# Altium PCB PCB1.PcbDoc (part 4 of 7)
Units mil, origin at the board's own origin, x right, y up, seen from the top; angles counter-clockwise.
Board outline 2100 x 2700 mil, 6 copper layers (Top Layer, Layer 2, Layer 3, Layer 4, Layer 5, Bottom Layer), stack 32.112 mil thick; 200 components, 319 nets, 1280 pads, 807 vias.
Unrouted connection lines stored in the file: 4.
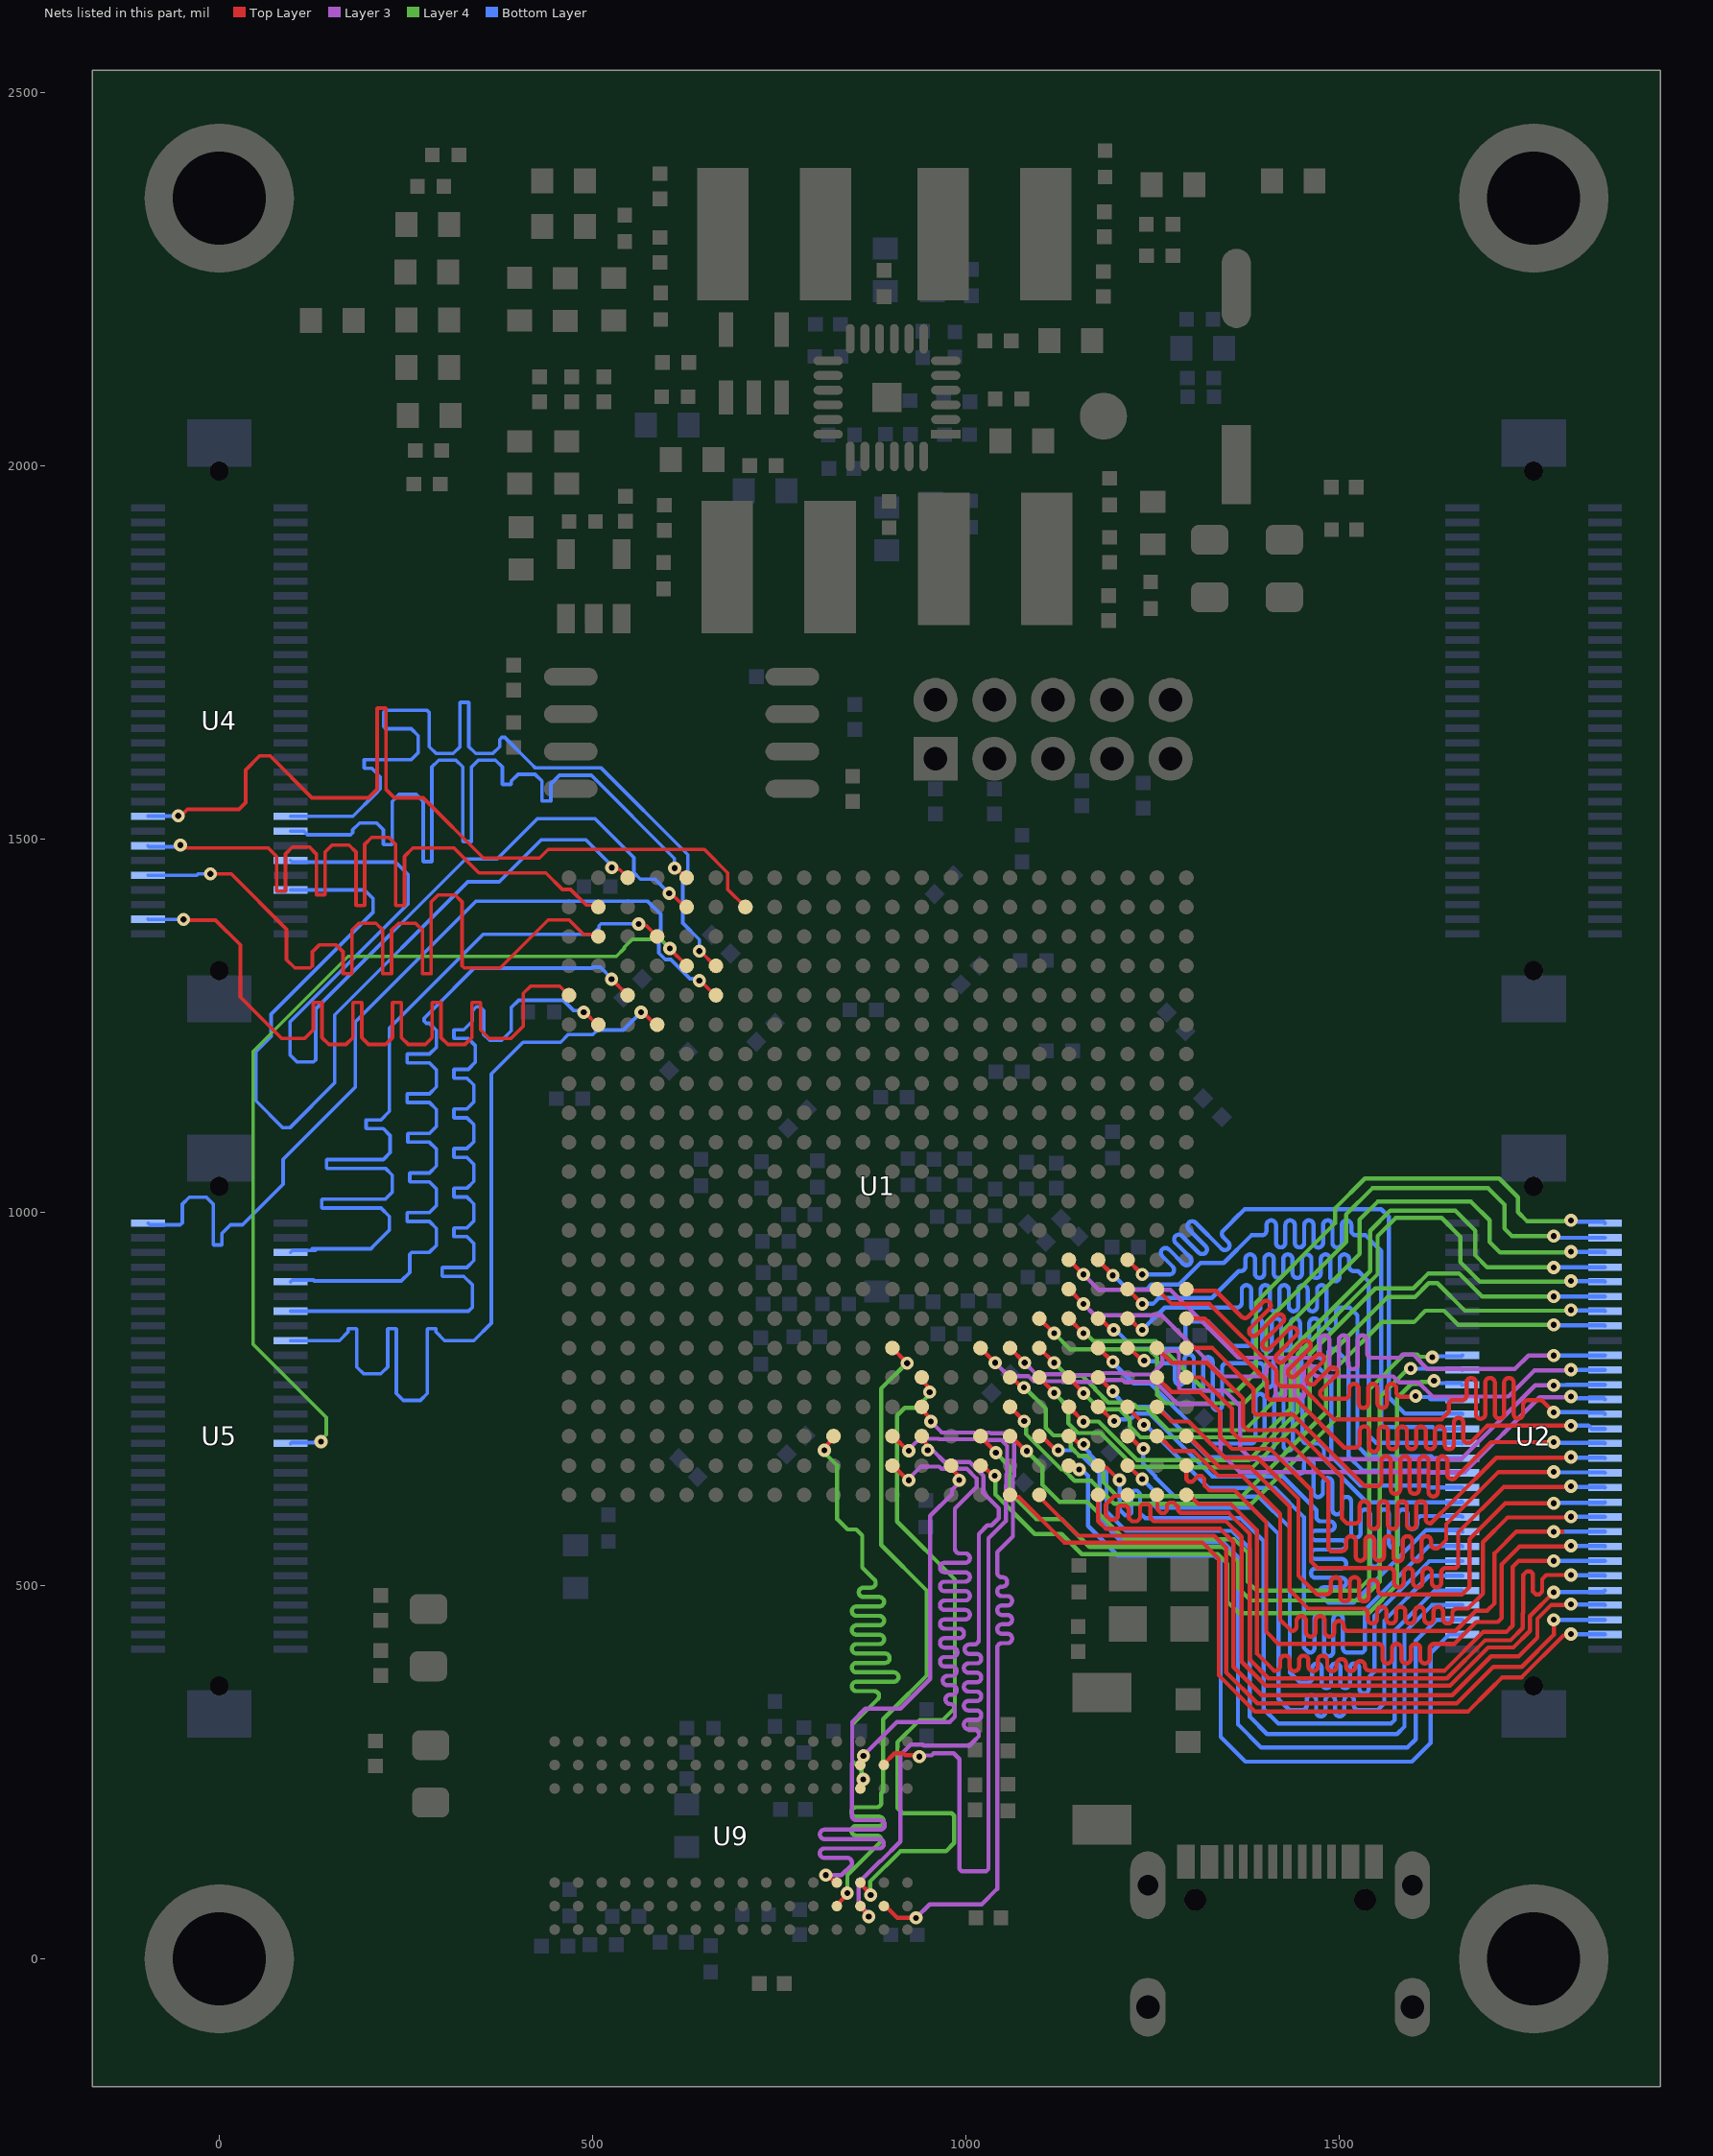
[diagram p8: the nets of this part, all layers, seen from the top]

## Via types
v1: diameter 17.7, hole 7.9, Top Layer to Bottom Layer, tented both sides, 807 vias

## Nets (pads, with @x,y where several pads share a name; then routed paths per layer and width w, separated by ;. In a path a pad name is that pad's centre, name@x,y a point inside that pad or via, vN(x,y) a via of type N, cw(c..) or ccw(c..) an arc to the next point about the centre after c; other vN are vias at no path point) (continued)
B16_P_L11: U1.B17 U5.48 | length 1225.4
  Top Layer w4.77: v1(487.87,1267.74) 489.4,1267.74 506.03,1251.11 U1.B17@507.56,1251.11
  Bottom Layer w4.77: U5.48@95.47,867.31 333.44,867.31 338.77,872.64 338.77,889.79 338.77,902.62 327.32,914.07 298.93,914.07 298.34,914.66 298.34,925.25 298.93,925.84 331.53,925.84 340.77,935.08 340.77,957.91 331.53,967.15 314.76,967.15 314.17,967.74 314.17,978.33 314.76,978.92 331.53,978.92 340.77,988.16 340.77,1010.99 331.53,1020.23 314.76,1020.23 314.17,1020.82 314.17,1031.41 314.76,1032 331.53,1032 340.77,1041.24 340.77,1064.07 331.53,1073.31 314.76,1073.31 314.17,1073.9 314.17,1084.49 314.76,1085.08 331.53,1085.08 340.77,1094.32 340.77,1117.15 331.53,1126.39 314.76,1126.39 314.17,1126.98 314.17,1137.57 314.76,1138.16 331.53,1138.16 340.77,1147.4 340.77,1170.23 331.53,1179.47 314.76,1179.47 314.17,1180.06 314.17,1190.65 314.76,1191.24 333.32,1191.24 342.56,1200.48 342.56,1223.31 333.32,1232.55 314.76,1232.55 314.17,1233.14 314.17,1243.73 314.76,1244.32 327.32,1244.32 338.77,1255.76 338.77,1268.64 338.77,1269.77 344,1275 349,1275 354,1270 354,1238 362,1230 378,1230 391,1243 391,1274 400.72,1283.73 417.89,1283.73 430.1,1283.74 460.71,1283.73 474.7,1269.74 485.87,1269.74 v1(487.87,1267.74)
B16_P_L12: U1.D17 U5.44 | length 1182.5
  Top Layer w4.77: v1(564.67,1267.82) 567.13,1267.82 583.84,1251.11 U1.D17@586.3,1251.11
  Bottom Layer w4.77: U5.44@95.47,827.94 148,827.94 160.83,827.94 172.28,839.39 172.28,843.18 172.86,843.77 183.46,843.77 184.05,843.18 184.05,792.61 193.29,783.37 216.12,783.37 225.36,792.61 225.36,843.18 225.94,843.77 236.54,843.77 237.13,843.18 237.13,757.18 246.37,747.94 269.2,747.94 278.44,757.18 278.44,843.18 279.02,843.77 289.62,843.77 290.21,843.18 290.21,839.39 301.65,827.94 324.18,827.94 340.94,827.94 364.31,851.31 364.31,1185.12 405,1225.81 406.84,1227.65 456.97,1227.65 467.09,1237.76 500.09,1237.76 506.33,1244 540.85,1244 v1(564.67,1267.82)
B16_P_L13: U1.C18 U5.52 | length 1188.8
  Top Layer w4.77: v1(525.27,1311.95) 525.36,1311.95 543.89,1293.43 544.09,1293.43 544.09,1290.48 U1.C18@546.93,1290.48
  Bottom Layer w4.77: U5.52@95.47,906.68 97.93,909.14 125.85,909.14 127.25,907.74 243.55,907.74 255,919.19 255,921.56 255,943.44 257.79,946.24 281.39,946.24 290.63,955.48 290.63,978.31 281.39,987.55 251.99,987.55 251.4,988.14 251.4,998.73 251.99,999.32 281.39,999.32 290.63,1008.56 290.63,1031.39 281.39,1040.63 255.6,1040.63 255.01,1041.22 255.01,1051.81 255.6,1052.4 281.39,1052.4 290.63,1061.64 290.63,1084.47 281.39,1093.71 252.92,1093.71 252.33,1094.3 252.33,1104.89 252.92,1105.48 281.39,1105.48 290.63,1114.72 290.63,1137.55 281.39,1146.79 251.99,1146.79 251.4,1147.38 251.4,1157.97 251.99,1158.56 281.39,1158.56 290.63,1167.8 290.63,1190.63 281.39,1199.87 251.99,1199.87 251.4,1200.46 251.4,1211.05 251.99,1211.64 281.39,1211.64 290.63,1220.88 290.63,1243.71 281.39,1252.95 277.07,1252.95 274.27,1255.74 274.27,1259.69 287.1,1272.52 341.29,1326.71 405,1326.71 498.93,1326.71 500.19,1327.97 510.39,1327.97 525.27,1313.1 v1(525.27,1311.95)
B16_P_L14: U1.E19 U5.30 | length 1266.6
  Top Layer w4.77: v1(603.34,1353.1) 603.34,1352.64 625.67,1330.31 U1.E19@625.67,1329.85
  Layer 4 w4.77: v1(136,692.7) 136,694.72 143.24,701.96 143.24,724.99 45.23,823 45.23,1215.23 172.52,1342.52 405,1342.52 531.74,1342.52 542.36,1353.14 542.36,1354.81 552.98,1365.43 591.01,1365.43 v1(603.34,1353.1)
  Bottom Layer w4.77: U5.30@95.47,690.15 96.75,691.42 134.72,691.42 v1(136,692.7)
B16_P_L15: U1.F18 U5.59 | length 1206.1
  Top Layer w4.77: v1(642.76,1310.17) 644.06,1310.17 663.74,1290.48 U1.F18@665.04,1290.48
  Bottom Layer w4.77: U5.59@-95.46,985.42 -93.01,982.97 -59,982.97 -52.29,982.97 -49.49,985.76 -49.49,1010.78 -40.25,1020.02 -17.42,1020.02 -8.18,1010.78 -8.18,956.59 -7.6,956.01 3,956.01 3.59,956.59 3.59,971.52 15.03,982.97 31.08,982.97 61,1012.89 85.45,1037.33 85.45,1070.87 182,1167.42 182,1254.89 343.37,1416.26 573.87,1416.26 591,1399.13 591,1366.88 588.6,1364.48 588.6,1347 597.24,1338.37 604.6,1338.37 630.33,1312.64 640.28,1312.64 v1(642.76,1310.17)
B16_P_L16: U1.B20 U4.9 | length 1210.4
  Top Layer w4.77: v1(-12,1452.97) 16,1452.97 90,1378.97 90,1338 101,1327 115,1327 121.71,1327 124.51,1329.79 124.51,1348.52 133.75,1357.76 156.58,1357.76 165.82,1348.52 165.82,1319.83 166.4,1319.25 177,1319.25 177.59,1319.83 177.59,1377.76 186.83,1387 209.66,1387 218.9,1377.76 218.9,1319.83 219.48,1319.25 230.08,1319.25 230.67,1319.83 230.67,1377.76 239.91,1387 262.74,1387 271.98,1377.76 271.98,1319.83 272.56,1319.25 283.16,1319.25 283.75,1319.83 283.75,1415.41 292.99,1424.65 315.82,1424.65 325.06,1415.41 325.06,1329.79 327.85,1327 376,1327 396.65,1347.65 440.27,1391.27 468.38,1391.27 487.66,1371.99 504.79,1371.99 U1.B20@507.56,1369.22
  Bottom Layer w4.77: U4.9@-95.47,1451.3 -30.31,1451.3 -28.64,1452.97 v1(-12,1452.97)
B16_P_L17: U1.A18 U4.3 | length 1212.8
  Top Layer w4.77: v1@-43.07,1391.14 -5.14,1391.14 28.16,1357.84 28.16,1287.95 83.44,1232.67 101.52,1232.67 114.35,1232.67 125.8,1244.12 125.8,1280.35 126.39,1280.94 136.98,1280.94 137.57,1280.35 137.57,1233.78 146.81,1224.54 169.64,1224.54 178.88,1233.78 178.88,1280.35 179.47,1280.94 190.06,1280.94 190.65,1280.35 190.65,1233.78 199.89,1224.54 222.72,1224.54 231.96,1233.78 231.96,1280.35 232.55,1280.94 243.14,1280.94 243.73,1280.35 243.73,1233.78 252.97,1224.54 275.8,1224.54 285.04,1233.78 285.04,1280.35 285.63,1280.94 296.22,1280.94 296.81,1280.35 296.81,1233.78 306.05,1224.54 328.88,1224.54 338.12,1233.78 338.12,1280.35 338.71,1280.94 349.3,1280.94 349.89,1280.35 349.89,1244.12 361.33,1232.67 379.7,1232.67 390.67,1232.67 407,1249 407,1293 416.78,1302.78 455.89,1302.78 U1.A18@468.19,1290.48
  Bottom Layer w4.77: U4.3@-95.47,1392.24 -95.35,1392.12 -48.12,1392.12 v1(-48,1392)
B16_P_L18: U1.F19 U4.18 | length 1194.6
  Top Layer w4.77: v1(642.76,1349.54) 644.06,1349.54 663.74,1329.85 U1.F19@665.04,1329.85
  Bottom Layer w4.77: U4.18@95.47,1530.04 178.93,1530.04 208.89,1560 215.6,1566.71 215.6,1582.9 204.15,1594.35 194.46,1594.35 193.87,1594.93 193.87,1605.53 194.46,1606.12 257.04,1606.12 266.28,1615.36 266.28,1638.18 257.04,1647.43 222.84,1647.43 220.04,1650.22 220.04,1666 220.04,1669.21 222.84,1672 245,1672 278.25,1672 281.05,1669.21 281.05,1623.45 290.29,1614.21 313.12,1614.21 322.36,1623.45 322.36,1682.28 322.94,1682.86 333.54,1682.86 334.13,1682.28 334.13,1623.45 343.37,1614.21 366.2,1614.21 375.44,1623.45 375.44,1633.02 378.23,1635.82 382.18,1635.82 418.44,1599.56 422.77,1595.23 474.5,1595.23 510.88,1595.23 627.44,1478.67 627.44,1457.71 620.72,1450.99 620.72,1387.21 642.88,1365.05 642.88,1349.66 v1(642.76,1349.54)
B16_P_L19: U1.D20 U5.56 | length 1228.2
  Top Layer w4.77: v1(561.49,1385.96) 563.97,1383.49 572.03,1383.49 U1.D20@586.3,1369.22
  Bottom Layer w4.77: U5.56@95.47,946.05 97.97,948.56 128.44,948.56 ; 124.36,950.97 202.86,950.97 207.18,955.29 227.86,975.97 227.86,981.35 227.86,994.18 216.41,1005.63 137.66,1005.63 137.07,1006.22 137.07,1016.81 137.66,1017.4 222.23,1017.4 231.47,1026.64 231.47,1049.47 222.23,1058.71 144.15,1058.71 143.56,1059.3 143.56,1069.89 144.15,1070.48 219.55,1070.48 228.79,1079.72 228.79,1102.55 219.55,1111.79 197.23,1111.79 196.64,1112.38 196.64,1122.97 197.23,1123.56 216.41,1123.56 227.86,1135 227.86,1150 227.86,1246.57 353.28,1371.99 405,1371.99 499.85,1371.99 508.5,1380.64 508.5,1383.57 511.3,1386.36 561.1,1386.36 v1(561.49,1385.96)
B16_P_L20: U1.C22 U4.8 | length 1201.5
  Top Layer w4.77: v1(525.63,1461.31) 528.08,1458.85 536.04,1458.85 543.65,1451.24 543.65,1447.96 U1.C22@546.93,1447.96
  Bottom Layer w4.77: U4.8@95.47,1431.61 194.24,1431.61 205.69,1420.17 205.69,1401.26 69.46,1265.03 69.46,1235.46 49,1215 49,1149 85.02,1112.98 94.27,1112.98 154.54,1173.25 154.54,1264.25 332.82,1442.53 374.82,1442.53 431.06,1498.77 490.88,1498.77 525.63,1464.03 v1(525.63,1461.31)
B16_P_L21: U1.B21 U4.13 | length 1182
  Top Layer w4.77: v1(-52.2,1491.67) -52.2,1488.2 -51.77,1487.77 26,1487.77 65.37,1487.77 76.82,1476.32 76.82,1430.36 77.4,1429.77 88,1429.77 88.59,1430.36 88.59,1479.83 97.83,1489.07 120.66,1489.07 129.9,1479.83 129.9,1425.59 130.48,1425.01 141.08,1425.01 141.67,1425.59 141.67,1482.44 150.91,1491.68 173.74,1491.68 182.98,1482.44 182.98,1411.13 183.56,1410.54 194.16,1410.54 194.75,1411.13 194.75,1492.57 203.99,1501.81 226.82,1501.81 236.06,1492.57 236.06,1411.13 236.64,1410.54 247.24,1410.54 247.83,1411.13 247.83,1476.32 259.27,1487.77 280.14,1487.77 314.23,1487.77 347.69,1454.31 437.16,1454.31 459.24,1432.23 470.34,1432.23 491.13,1411.44 504.71,1411.44 U1.B21@507.56,1408.59
  Bottom Layer w4.77: U4.13@-95.47,1490.67 -94.13,1489.33 -53.33,1489.33 -53.33,1490.54 v1(-52.2,1491.67)
B16_P_L22: U1.E22 U4.16 | length 1202.6
  Top Layer w4.77: v1(609.74,1460.84) 611.26,1460.84 624.15,1447.96 U1.E22@625.67,1447.96
  Bottom Layer w4.77: U4.16@95.47,1510.35 113.19,1510.35 118.1,1505.44 169,1505.44 175.71,1505.44 178.51,1508.23 178.51,1512.03 187.75,1521.27 210.58,1521.27 219.82,1512.03 219.82,1492.9 220.4,1492.31 231,1492.31 231.59,1492.9 231.59,1550.06 240.83,1559.3 263.66,1559.3 272.9,1550.06 272.9,1470.02 273.48,1469.43 284.08,1469.43 284.67,1470.02 284.67,1596.2 293.91,1605.44 316.74,1605.44 325.98,1596.2 325.98,1497.13 326.56,1496.54 337.16,1496.54 337.75,1497.13 337.75,1596.2 346.99,1605.44 369.82,1605.44 379.06,1596.2 379.06,1573.37 379.64,1572.78 390.24,1572.78 390.83,1573.37 390.83,1577.22 400.07,1586.46 422.9,1586.46 432.14,1577.22 432.14,1551.12 432.72,1550.53 443.32,1550.53 443.91,1551.12 443.91,1573.55 455.35,1585 482.11,1585 498.15,1585 609.47,1473.67 609.47,1461.11 v1(609.74,1460.84)
B16_P_L23: U1.E21 U4.12 | length 1242.8
  Top Layer w4.77: v1(602.41,1426.95) 604.86,1426.95 623.22,1408.59 U1.E21@625.67,1408.59
  Bottom Layer w4.77: U4.12@95.47,1470.98 97.68,1468.77 236.12,1468.77 252.77,1452.12 252.77,1412.77 94.77,1254.77 94.77,1210.33 104,1201.1 126.21,1201.1 129,1203.89 129,1272 330,1473 372,1473 425.99,1526.99 503.08,1526.99 555.13,1474.93 555.13,1454.74 563.77,1446.11 583.25,1446.11 v1(602.41,1426.95)
B16_P_L24: U1.G21 U4.17 | length 1191.4
  Top Layer w4.77: v1(-54.94,1530.76) -51.45,1530.76 -42.87,1539.34 26.22,1539.34 35.33,1548.44 35.33,1592.33 54,1611 68,1611 124,1555 187,1555 199.83,1555 211.28,1566.45 211.28,1674.41 211.86,1675 222.46,1675 223.05,1674.41 223.05,1566.45 234.49,1555 258,1555 273,1555 353.66,1474.33 428.91,1474.33 440.43,1485.85 649.39,1485.85 680.77,1454.48 680.77,1432.23 U1.G21@704.41,1408.59
  Bottom Layer w4.77: U4.17@-95.47,1530.04 -95.1,1530.4 -55.31,1530.4 v1(-54.94,1530.76)
B34_IO0: U1.T3 U2.41 | length 1010.6
  Top Layer w5.61: U1.T3@1058.74,699.93 1059.98,699.93 1079.91,680 v1(1081.15,680)
  Layer 4 w5.61: v1(1081.15,680) 1102.15,659 1102.15,634.84 1125.11,611.89 1162.23,611.89 1212.12,562 1359,562 1377,544 1377,505 1389,493 1524,493 1540,509 1540,762.59 1586.54,809.13 1604.25,809.13 1607.05,806.32 1623.51,806.32 v1(1624.32,805.52)
  Bottom Layer w5.61: v1(1624.32,805.52) 1625.69,806.89 1663.17,806.89 U2.41@1664.54,808.26
B34_IO25: U1.U7 U2.58 | length 1067.1
  Top Layer w5.61: U1.U7@1098.11,857.41 v1(1117.8,837.72)
  Layer 4 w5.61: v1(1117.8,837.72) 1139.2,816.32 1244.69,816.32 1256,805 1256,755 1267,744 1372,744 1402,774 1402,853 1509,960 1509,997 1544,1032 1699,1032 1721,1010 1721,978 1731,968 v1(1787,968)
  Bottom Layer w5.61: v1(1787,968) 1789.26,965.74 U2.58@1855.47,965.74
B34_N_L1: U1.U1 U2.6 | length 1021.4
  Top Layer w5.61: U1.U1@1098.11,621.19 1098.11,618.74 1150.2,566.65 1332.35,566.65 1341,558 1348.39,550.61 1348.39,383.61 1390,342 1657,342 1706,391 1744,391 1787,434 v1(1787,454)
  Bottom Layer w5.61: 1796,454 1796.04,453.96 U2.6@1855.43,453.96 ; U2.6@1855.43,453.96 U2.6@1855.47,453.93
B34_N_L2: U1.V2 U2.3 | length 994.3
  Bottom Layer w5.61: v1(1151.49,655.45) 1154.71,655.45 1163.23,646.93 1163.23,579.77 1203,540 1333,540 1341,532 1341,297 1374,264 1597,264 1622,289 1622,409.43 1646.82,434.24 U2.3@1664.53,434.24 U2.3@1663.77,435
B34_N_L3: U1.R2 U2.37 | length 1048.8
  Top Layer w5.61: U1.R2@1019.37,660.56 1022.53,660.56 1022.53,660.12 1035.74,646.92 v1(1038.47,646.92)
  Layer 4 w5.61: v1(1038.47,646.92) 1039.19,646.2 1039.19,621.81 1092,569 1128,569 1155,542 1337,542 1350,529 1350,478 1365,463 1539,463 1577,501 1577,750.79 1596.21,770 1606.5,770 1609.31,772.81 1625.17,772.81 v1(1626.57,774.21)
  Bottom Layer w5.61: v1(1626.57,774.21) 1629.84,774.21 1633.12,770.93 1662.49,770.93 U2.37@1664.54,768.89
B34_N_L4: U1.Y2 U2.11 | length 985.4
  Top Layer w5.61: U1.Y2@1216.22,660.56 1217,660.56 1235.13,642.43 v1(1235.91,642.43)
  Bottom Layer w5.61: v1(1235.91,642.43) 1251,627.34 1251,608 1255,604 1383,604 1418.5,568.5 1418.5,347.5 1433,333 1447,333 1449.81,333 ccw(c1449.81,339.3) 1456.11,339.3 1456.11,346.7 cw(c1462.42,346.7) 1468.72,346.7 1468.72,330.91 ccw(c1475.03,330.91) 1481.33,330.91 1481.33,346.7 cw(c1487.64,346.7) 1493.94,346.7 1493.94,330.91 ccw(c1500.25,330.91) 1506.55,330.91 1506.55,346.7 cw(c1512.86,346.7) 1519.16,346.7 1519.16,339.3 ccw(c1525.47,339.3) 1525.47,333 1548.38,333 1551,333 1560,342 1560,453 1619.98,512.98 U2.11@1664.53,512.98
B34_N_L5: U1.Y1 U2.10 | length 1042
  Top Layer w5.61: U1.Y1@1216.22,621.19 1215.03,620 1198.5,620 1187,608.5 1187,594 1193,588 1199.71,588 1203,591.29 1203,603.71 1206.29,607 1214,607 1218,603 1218,590 1222,586 1229,586 1233,590 1233,605.71 1236.29,609 1243.71,609 1247,605.71 1247,590.29 1251.29,586 1347.91,586 1368.91,565 1368.91,398.09 1401,366 1648,366 1699,417 1732.91,417 1755,439.09 1755,459 v1(1787,491)
  Bottom Layer w5.61: v1(1787,491) 1832.35,491 1832.53,491.18 1853.35,491.18 U2.10@1855.47,493.3
B34_N_L6: U1.V3 U2.7 | length 1004.3
  Top Layer w5.61: U1.V3@1137.48,699.93 1141.29,699.93 1149.9,691.32 1155.22,691.32 v1(1157.53,689.01)
  Bottom Layer w5.61: v1(1157.53,689.01) 1157.53,685.73 1165.03,678.24 1165.03,676.22 1188,653.25 1188,599 1214,573 1356,573 1380,549 1380,324 1403,301 1577,301 1587,311 1587,437 1623.61,473.61 U2.7@1664.53,473.61
B34_N_L7: U1.AB1 U2.14 | length 982.2
  Top Layer w5.61: U1.AB1@1294.96,621.19 1298.77,621.19 1310.96,609 1354.48,609 1389.61,573.87 1389.61,408.61 1411.48,386.74 1412.22,386 1414.28,386 ccw(c1414.28,392.3) 1420.59,392.3 1420.59,399.7 cw(c1426.89,399.7) 1433.2,399.7 1433.2,391.53 ccw(c1439.5,391.53) 1445.81,391.53 1445.81,399.7 cw(c1452.11,399.7) 1458.42,399.7 1458.42,391.53 ccw(c1464.72,391.53) 1471.03,391.53 1471.03,399.7 cw(c1477.33,399.7) 1483.64,399.7 1483.64,391.53 ccw(c1489.94,391.53) 1496.25,391.53 1496.25,395.15 cw(c1502.55,395.15) 1508.86,395.15 1508.86,391.53 ccw(c1515.16,391.53) 1521.47,391.53 1521.47,392.31 cw(c1527.77,392.31) 1534.08,392.31 ccw(c1540.38,392.3) 1540.38,386 1611.48,386 1640.82,386 1692.82,438 1723.78,438 1731.89,446.11 1731.89,524.89 1740,533 v1(1787,533)
  Bottom Layer w5.61: v1@1795,533 1795.17,532.83 1855.3,532.83 U2.14@1855.47,532.67
B34_N_L8: U1.AB2 U2.16 | length 993.5
  Top Layer w5.61: U1.AB2@1294.96,660.56 1294.96,642.18 1298.25,638.89 1302.89,638.89 1310.68,646.68 1315.32,646.68 1319,643 1319,634 1326,627 1360,627 1402,585 1402,438 1418.12,421.88 1536,421.88 1551.42,421.88 cw(c1551.42,415.58) 1557.72,415.58 1557.72,401.91 ccw(c1564.03,401.91) 1570.33,401.91 1570.33,415.58 cw(c1576.64,415.58) 1582.94,415.58 1582.94,401.91 ccw(c1589.25,401.91) 1595.55,401.91 1595.55,415.58 cw(c1601.86,415.58) 1608.16,415.58 1608.16,401.91 ccw(c1614.47,401.91) 1620.77,401.91 1620.77,415.58 cw(c1627.08,415.58) 1627.08,421.88 1653.88,421.88 1683,451 1712,451 1717.27,456.27 1717.27,528.27 1741,552 v1@1814,552
  Bottom Layer w5.61: v1(1810,553) 1810.32,552.68 1855.15,552.68 U2.16@1855.47,552.35
B34_N_L9: U1.AA3 U2.18 | length 992.6
  Top Layer w5.61: U1.AA3@1255.59,699.93 1258.25,699.93 1277.94,680.24 1304.42,680.24 1337.66,647 1369.66,647 1420.66,596 1420.66,454 1433.39,441.27 1435.66,439 1436.2,439 ccw(c1436.2,445.3) 1442.5,445.3 1442.5,452.7 cw(c1448.81,452.7) 1455.11,452.7 1455.11,437.8 ccw(c1461.42,437.8) 1467.72,437.8 1467.72,452.7 cw(c1474.03,452.7) 1480.33,452.7 1480.33,437.8 ccw(c1486.64,437.8) 1492.94,437.8 1492.94,446.11 cw(c1499.25,446.11) 1505.55,446.11 1505.55,445.3 ccw(c1511.86,445.3) 1511.86,439 1530.39,439 1655.59,439 1682.59,466 1697.66,466 1707.66,476 1707.66,543 1736.66,572 v1(1787,572) 1798.66,572
  Bottom Layer w5.61: 1796.02,572.02 U2.18@1855.47,572.04
B34_N_L10: U1.AB5 U2.26 | length 1032.1
  Top Layer w5.61: U1.AB5@1294.96,778.67 1314.32,778.67 1356,737 1356,706 1367,695 1429,695 1485,639 1485,549.29 1488.29,546 1500,546 1502.81,546 ccw(c1502.81,552.3) 1509.11,552.3 1509.11,559.7 cw(c1515.42,559.7) 1521.72,559.7 1521.72,539.3 ccw(c1528.03,539.3) 1534.33,539.3 1534.33,559.7 cw(c1540.64,559.7) 1546.94,559.7 1546.94,539.3 ccw(c1553.25,539.3) 1559.55,539.3 1559.55,559.7 cw(c1565.86,559.7) 1572.16,559.7 1572.16,538.49 ccw(c1578.47,538.49) 1584.77,538.49 1584.77,559.7 cw(c1591.08,559.7) 1597.38,559.7 1597.38,538.52 ccw(c1603.69,538.52) 1609.99,538.52 1609.99,559.7 cw(c1616.3,559.7) 1622.6,559.7 1622.6,555.82 ccw(c1628.91,555.82) 1633.36,551.36 1641,559 1643,561 1643,582 1713,652 v1(1787,652) v1@1791,652
  Bottom Layer w5.61: v1@1791,652 1791.61,651.39 1854.86,651.39 U2.26@1855.47,650.78
B34_N_L11: U1.AA4 U2.22 | length 989.8
  Top Layer w5.61: U1.AA4@1255.59,739.3 1275.28,719.61 1298.11,719.61 1346.73,671 1390,671 1445,616 1445,513 1447.97,510.03 1470,488 1482.31,488 ccw(c1482.31,494.3) 1488.61,494.3 1488.61,504.89 cw(c1494.91,504.89) 1501.22,504.89 1501.22,484.91 ccw(c1507.52,484.91) 1513.83,484.91 1513.83,504.89 cw(c1520.14,504.89) 1526.44,504.89 1526.44,484.92 ccw(c1532.74,484.92) 1539.05,484.92 1539.05,501.21 cw(c1545.35,501.21) 1551.66,501.21 1551.66,494.3 ccw(c1557.97,494.3) 1557.97,488 1603.97,488 1664,488 1674,498 1674,562 1722,610 v1(1787,610) v1@1792,610
  Bottom Layer w5.61: v1@1792,610 1792.7,610.7 1854.77,610.7 U2.22@1855.47,611.41
B34_N_L12: U1.W4 U2.17 | length 991.2
  Top Layer w5.61: U1.W4@1176.85,739.3 1178.05,739.3 1197.13,720.22 v1(1198.33,720.22)
  Bottom Layer w5.61: v1(1198.33,720.22) 1200.64,722.53 1214.54,722.53 1215.76,723.75 1221.18,723.75 1227.78,730.36 1245.48,730.36 1329.84,646 1424,646 1469,601 1469,595.02 1469,592.21 ccw(c1475.31,592.21) 1475.31,585.91 1487.21,585.91 cw(c1487.21,579.6) 1487.21,573.3 1468.16,573.3 ccw(c1468.16,566.99) 1468.16,560.69 1502.69,560.69 cw(c1502.69,554.38) 1502.69,548.08 1468.16,548.08 ccw(c1468.16,541.77) 1468.16,535.47 1502.69,535.47 cw(c1502.69,529.16) 1502.69,522.86 1468.16,522.86 ccw(c1468.16,516.55) 1468.16,510.25 1502.69,510.25 cw(c1502.69,503.94) 1502.69,497.64 1479.58,497.64 ccw(c1479.58,491.33) 1475.12,486.88 1484,478 1485,477 1519,477 1616,574 1662.57,574 U2.17@1664.53,572.04
B34_N_L13: U1.T4 U2.46 | length 1014.9
  Top Layer w5.61: U1.T4@1058.74,739.3 1058.74,739.2 1077.85,720.1 v1(1077.85,720)
  Layer 4 w5.61: v1(1077.85,720) 1080.16,717.69 1080.16,702.84 1127.67,655.33 1130.17,655.33 1145.21,640.29 1167.59,640.29 1198.66,609.22 1381.63,609.22 1499,726.59 1499,794.79 1557.11,852.89 ; 1557.3,852.7 1599.7,852.7 1615,868 1640,868 1659,849 v1@1792,849
  Bottom Layer w5.61: v1@1792,849 1792.69,848.31 1854.78,848.31 U2.46@1855.47,847.63
  other v1: 1787,849
B34_N_L14: U1.U5 U2.50 | length 985.2
  Top Layer w5.61: U1.U5@1098.11,778.67 1098.11,778.05 1117.8,758.36 v1(1117.8,757.74)
  Layer 4 w5.61: v1(1117.8,757.74) 1137,738.53 1137,717 1149.84,704.16 1179.96,704.16 1225.23,658.89 1304.06,658.89 1304.56,658.39 1383.98,658.39 1460,734.41 1460,810 1548,898 1599,898 1619,918 1660,918 1691,887 v1@1790,887
  Bottom Layer w5.61: v1@1790,887 U2.50@1855.47,887
  other v1: 1787,887
B34_N_L15: U1.W5 U2.19 | length 1034.3
  Top Layer w5.61: U1.W5@1176.85,778.67 1177.47,778.67 1195.91,760.23 v1(1196.54,760.23)
  Bottom Layer w5.61: v1(1196.54,760.23) 1196.54,758.03 1204.98,749.58 1204.98,749.29 1214.8,739.47 1256.53,739.47 1324,672 1414,672 1421,672 1441.81,651.19 ccw(c1446.26,655.65) 1452.57,655.65 1452.57,662.92 cw(c1458.87,662.92) 1465.18,662.92 1465.18,624.72 ccw(c1471.48,624.72) 1477.79,624.72 1477.79,637.7 cw(c1484.09,637.7) 1490.4,637.7 1490.4,601.52 ccw(c1496.7,601.52) 1503.01,601.52 1503.01,612.48 cw(c1509.31,612.48) 1515.62,612.48 1515.62,570.27 ccw(c1521.92,570.27) 1528.23,570.27 1528.23,595.49 cw(c1534.53,595.49) 1540.84,595.49 1540.84,531.35 ccw(c1547.14,531.35) 1553.45,531.35 1553.45,595.49 cw(c1559.75,595.49) 1566.06,595.49 1566.06,556.57 ccw(c1572.36,556.57) 1578.67,556.57 1578.67,595.49 cw(c1584.97,595.49) 1591.28,595.49 1591.28,581.79 ccw(c1597.58,581.79) 1603.89,581.79 1603.89,586.7 cw(c1610.19,586.7) 1610.19,593 1613,593 1663.26,593 U2.19@1664.53,591.72
B34_N_L16: U1.V5 U2.54 | length 1011.3
  Top Layer w5.61: U1.V5@1137.48,778.67 1137.48,778.07 1157.35,758.2 v1(1157.35,757.61)
  Layer 4 w5.61: v1(1157.35,757.61) v1(1157.35,757.61) 1178.94,735.97 1205.67,735.97 1219.15,722.49 1219.15,712.86 1233.7,698.31 1395.72,698.31 1434.39,736.98 1434.39,814.39 1541,921 1541,975 1567.9,1001.9 1655.1,1001.9 1682,975 1682,942 1698,926 v1@1789,926
  Bottom Layer w5.61: v1@1789,926 1789.18,926.18 1855.29,926.18 U2.54@1855.47,926.37
  other v1: 1787,926
B34_N_L17: U1.T6 U2.38 | length 994.5
  Top Layer w5.61: U1.T6@1058.74,818.04 v1(1078.43,798.35)
  Layer 3 w5.61: v1(1078.43,798.35) 1094.09,782.69 1132.54,782.69 1133.35,781.88 1171.81,781.88 1174.43,784.49 1212.89,784.49 1214.8,782.58 1248.68,782.58 1263,796.9 1263,808 1269,814 1281.71,814 1285,810.71 1285,764.29 1288.29,761 1346,761 1367,740 1367,684 1382,669 1663,669 1762,768 v1@1788,768
  Bottom Layer w5.61: v1@1788,768 1788.44,768.44 1803.3,768.44 1803.75,768.89 U2.38@1855.47,768.89
  other v1: 1787,768
B34_N_L18: U1.AA6 U2.28 | length 1030.3
  Top Layer w5.61: U1.AA6@1255.59,818.04 1275.28,798.35 1322.65,798.35 1371,750 1371,714 1377,708 1441,708 1503,646 1503,590 1510,583 1518,583 1520.81,583 ccw(c1520.81,589.3) 1527.11,589.3 1527.11,606.7 cw(c1533.42,606.7) 1539.72,606.7 1539.72,581.92 ccw(c1546.03,581.92) 1552.33,581.92 1552.33,606.7 cw(c1558.64,606.7) 1564.94,606.7 1564.94,581.92 ccw(c1571.25,581.92) 1577.55,581.92 1577.55,606.7 cw(c1583.86,606.7) 1590.16,606.7 1590.16,581.92 ccw(c1596.47,581.92) 1602.77,581.92 1602.77,606.7 cw(c1609.08,606.7) 1615.38,606.7 1615.38,589.3 ccw(c1621.69,589.3) 1621.69,583 1622,583 1652.69,613.69 1710,671 v1@1811,671
  Bottom Layer w5.61: v1(1810,672) 1810.77,671.23 1854.7,671.23 U2.28@1855.47,670.46
B34_N_L19: U1.W7 U2.25 | length 1010.5
  Top Layer w5.61: U1.W7@1176.85,857.41 1179.61,857.41 1194.86,842.16 v1(1197.62,842.16)
  Bottom Layer w5.61: v1(1197.62,842.16) 1200.25,842.16 1225.1,817.3 1286.45,817.3 1287.17,818.03 1289.2,818.03 1293.71,822.55 1293.71,850.34 1297,853.63 1324.37,853.63 1357,821 1361.25,821 1377.71,821 ccw(c1377.71,827.3) 1384.01,827.3 1384.01,851.34 cw(c1390.32,851.34) 1396.62,851.34 1396.62,819.36 ccw(c1402.93,819.36) 1409.23,819.36 1409.23,851.34 cw(c1415.54,851.34) 1421.84,851.34 1421.84,820.97 ccw(c1428.15,820.97) 1434.45,820.97 1434.45,851.34 cw(c1440.76,851.34) 1447.06,851.34 1447.06,821.02 ccw(c1453.37,821.02) 1459.67,821.02 1459.67,851.34 cw(c1465.98,851.34) 1472.28,851.34 1472.28,808.75 ccw(c1478.59,808.75) 1484.89,808.75 1484.89,810.89 cw(c1491.2,810.89) 1495.66,815.34 1500.31,810.69 1512,799 1512,673 1531,654 1617,654 1620.22,650.78 U2.25@1664.54,650.78
B34_N_L20: U1.AB6 U2.30 | length 1013
  Top Layer w5.61: U1.AB6@1294.96,818.04 1329.96,818.04 1385,763 1385,732.29 1388.29,729 1438,729 1534,633 1547,633 1549.81,633 ccw(c1549.81,639.3) 1556.11,639.3 1556.11,666.7 cw(c1562.42,666.7) 1568.72,666.7 1568.72,628.92 ccw(c1575.03,628.92) 1581.33,628.92 1581.33,666.7 cw(c1587.64,666.7) 1593.94,666.7 1593.94,628.92 ccw(c1600.25,628.92) 1606.55,628.92 1606.55,666.7 cw(c1612.86,666.7) 1619.16,666.7 1619.16,625.42 ccw(c1625.47,625.42) 1631.77,625.42 1631.77,666.7 cw(c1638.08,666.7) 1644.38,666.7 1644.38,648.6 ccw(c1650.69,648.6) 1655.14,644.14 1681.34,670.34 1703,692 v1(1787,692)
  Bottom Layer w5.61: v1(1787,692) 1787.93,691.07 1854.55,691.07 U2.30@1855.47,690.15
B34_N_L21: U1.V8 U2.40 | length 977.1
  Top Layer w5.61: U1.V8@1137.48,896.78 v1(1157.17,877.09)
  Layer 3 w5.61: v1(1157.17,877.09) 1172.26,862 1262,862 1344,780 1393,780 1395.81,780 ccw(c1395.81,786.3) 1402.11,786.3 1402.11,789.09 cw(c1408.42,789.09) 1414.72,789.09 1414.72,756.3 ccw(c1421.03,756.3) 1427.33,756.3 1427.33,789.09 cw(c1433.64,789.09) 1439.94,789.09 1439.94,756.3 ccw(c1446.25,756.3) 1452.55,756.3 1452.55,789.09 cw(c1458.86,789.09) 1465.16,789.09 1465.16,786.3 ccw(c1471.47,786.3) 1471.47,780 1485,780 1572,780 1580,772 1605.79,772 1624.79,753 1726,753 1761,788 v1@1815,788
  Bottom Layer w5.61: v1(1810,789) 1810.21,788.79 1855.26,788.79 U2.40@1855.47,788.57
B34_N_L22: U1.AB8 U2.35 | length 1056.2
  Top Layer w5.61: U1.AB8@1294.96,896.78 1297.05,894.69 1334.31,894.69 1367,862 1368.98,860.02 ccw(c1373.44,864.47) 1377.9,860.02 1397.27,879.38 cw(c1401.73,874.93) 1406.18,879.38 cw(c1401.73,874.93) 1406.18,870.47 1380.61,844.9 ccw(c1385.07,840.44) 1380.61,835.98 ccw(c1385.07,840.44) 1389.53,835.98 1415.1,861.55 cw(c1419.56,857.09) 1424.02,861.55 cw(c1419.56,857.09) 1424.02,852.63 1398.45,827.06 ccw(c1402.9,822.6) 1398.45,818.15 ccw(c1402.9,822.6) 1407.36,818.15 1432.93,843.72 cw(c1437.39,839.26) 1441.85,843.72 cw(c1437.39,839.26) 1441.85,834.8 1416.28,809.23 ccw(c1420.74,804.77) 1416.28,800.31 ccw(c1420.74,804.77) 1425.2,800.31 1450.77,825.88 cw(c1455.23,821.43) 1459.68,825.88 cw(c1455.23,821.43) 1459.68,816.97 1432.7,789.99 ccw(c1437.16,785.53) 1432.7,781.07 ccw(c1437.16,785.53) 1441.62,781.07 1468.6,808.05 cw(c1473.06,803.59) 1477.52,808.05 cw(c1473.06,803.59) 1477.52,799.13 1458.15,779.77 ccw(c1462.61,775.31) 1458.15,770.85 ccw(c1462.61,775.31) 1467.07,770.85 1486.43,790.22 cw(c1490.89,785.76) 1495.35,790.22 cw(c1490.89,785.76) 1495.35,781.3 1475.98,761.93 ccw(c1480.44,757.48) 1475.98,753.02 1479,750 1504,750 1506.81,750 ccw(c1506.81,756.3) 1513.11,756.3 1513.11,763.7 cw(c1519.42,763.7) 1525.72,763.7 1525.72,743.92 ccw(c1532.03,743.92) 1538.33,743.92 1538.33,763.7 cw(c1544.64,763.7) 1550.94,763.7 1550.94,743.92 ccw(c1557.25,743.92) 1563.55,743.92 1563.55,763.7 cw(c1569.86,763.7) 1576.16,763.7 1576.16,759 ccw(c1582.47,759) 1582.47,752.7 1601.04,752.7 v1(1602,753.66)
  Bottom Layer w5.61: v1(1602,753.66) 1603.25,752.41 1619.27,752.41 1622.07,749.6 1664.14,749.6 U2.35@1664.54,749.2
B34_N_L23: U1.Y7 U2.27 | length 993.2
  Top Layer w5.61: U1.Y7@1216.22,857.41 1218.44,857.41 1233.69,842.16 v1(1235.91,842.16)
  Bottom Layer w5.61: v1(1235.91,842.16) 1265.95,872.2 1360,872.2 1362.81,872.2 ccw(c1362.81,878.51) 1369.11,878.51 1369.11,895.9 cw(c1375.42,895.9) 1381.72,895.9 1381.72,873.56 ccw(c1388.03,873.56) 1394.33,873.56 1394.33,895.9 cw(c1400.64,895.9) 1406.94,895.9 1406.94,873.56 ccw(c1413.25,873.56) 1419.55,873.56 1419.55,895.9 cw(c1425.86,895.9) 1432.16,895.9 1432.16,873.56 ccw(c1438.47,873.56) 1444.77,873.56 1444.77,895.9 cw(c1451.08,895.9) 1457.38,895.9 1457.38,873.56 ccw(c1463.69,873.56) 1469.99,873.56 1469.99,895.9 cw(c1476.3,895.9) 1482.6,895.9 1482.6,848.51 ccw(c1488.91,848.51) 1495.21,848.51 1495.21,865.9 cw(c1501.52,865.9) 1501.52,872.2 1513.8,872.2 1524,862 1524,687 1538,673 1623,673 1625.54,670.46 U2.27@1664.54,670.46
B34_N_L24: U1.Y9 U2.33 | length 991.9
  Top Layer w5.61: U1.Y9@1216.22,936.15 v1(1235.91,916.46)
  Bottom Layer w5.61: v1(1235.91,916.46) 1265.54,916.46 1272.12,916.46 ccw(c1272.12,922.77) 1276.57,927.23 1262.57,941.23 cw(c1267.03,945.68) 1262.57,950.14 cw(c1267.03,945.68) 1271.49,950.14 1290.86,930.78 ccw(c1295.32,935.23) 1299.78,930.78 ccw(c1295.32,935.23) 1299.78,939.69 1280.41,959.06 cw(c1284.87,963.52) 1280.41,967.98 cw(c1284.87,963.52) 1289.32,967.98 1311.73,945.57 ccw(c1316.19,950.03) 1320.65,945.57 ccw(c1316.19,950.03) 1320.65,954.48 1298.24,976.89 cw(c1302.7,981.35) 1298.24,985.81 cw(c1302.7,981.35) 1307.16,985.81 1342.08,950.88 ccw(c1346.54,955.34) 1351,950.88 ccw(c1346.54,955.34) 1351,959.8 1344.36,966.44 cw(c1348.82,970.9) 1344.36,975.36 1354,985 1360,991 1373,1004 1556,1004 1566,994 1566,752 1588,730 1664.05,730 U2.33@1664.54,729.52
B34_P_L1: U1.T1 U2.4 | length 1051.7
  Top Layer w5.61: U1.T1@1058.74,621.19 1061.43,618.5 1070.5,618.5 1131.46,557.54 1316.46,557.54 1338.39,535.61 1338.39,379.61 1387,331 1672,331 1701,360 1718,377 1743.94,377 1799.62,432.69 1807.69,432.69 v1(1810,435)
  Bottom Layer w5.61: v1(1810,435) 1810.38,434.62 1855.09,434.62 U2.4@1855.47,434.24
B34_P_L3: U1.R3 U2.39 | length 1055.3
  Top Layer w5.61: U1.R3@1019.37,699.93 1019.37,696.12 1023.74,696.12 1023.53,695.92 1023.53,694.9 1039.81,678.62 v1(1039.81,677.76)
  Layer 4 w5.61: v1(1039.81,677.76) 1058,659.57 1058,625 1094,589 1127.85,589 1165.24,551.61 1344.39,551.61 1364,532 1364,497 1381,480 1529,480 1554,505 1554,752.48 1592.17,790.65 v1(1595.44,790.65)
  Bottom Layer w5.61: v1(1595.44,790.65) 1595.87,790.22 1617.47,790.22 1617.83,789.86 1663.24,789.86 U2.39@1664.54,788.57
B34_P_L4: U1.W2 U2.9 | length 988
  Top Layer w5.61: U1.W2@1176.85,660.56 1179.54,657.87 1187.91,657.87 1204.62,641.16 v1(1205.45,641.16)
  Bottom Layer w5.61: v1(1205.45,641.16) 1205.45,601.55 1213.07,593.93 1217.71,593.93 1221,597.22 1221,623.71 1224.29,627 1229,627 1233,623 1233,597 1240,590 1368,590 1398.5,559.5 1398.5,334.5 1418,315 1569,315 1574,320 1574,439.74 1627.55,493.3 U2.9@1664.53,493.3
B34_P_L5: U1.W1 U2.8 | length 974.1
  Top Layer w5.61: U1.W1@1176.85,621.19 1176.85,586.15 1187.24,575.76 1340.24,575.76 1358,558 1358,391 1396,353 1651,353 1703,405 1740,405 1765,430 1765,455.41 1783.59,474 1809,474 v1(1810,475)
  Bottom Layer w5.61: v1(1810,475) 1810.69,474.31 1854.78,474.31 U2.8@1855.47,473.61
B34_P_L6: U1.U3 U2.5 | length 1054.4
  Top Layer w5.61: U1.U3@1098.11,699.93 1101.31,699.93 1120.15,681.09 v1(1123.35,681.09)
  Bottom Layer w5.61: v1(1123.35,681.09) 1144.02,681.09 1151.25,673.85 1154.52,673.85 1178.89,649.48 1178.89,588.11 1209,558 1344,558 1364,538 1364,314 1395,283 1591,283 1602,294 1602,425.93 1630,453.93 U2.5@1664.53,453.93
B34_P_L7: U1.AA1 U2.12 | length 978.3
  Top Layer w5.61: U1.AA1@1255.59,621.19 1256.11,620.67 1256.11,601.89 1261.07,596.93 1265.71,596.93 1269,600.22 1269,607.71 1272.29,611 1278,611 1284,605 1284,600.29 1287.29,597 1352,597 1380,569 1380,400.59 1404.98,375.61 1644.02,375.61 1695.02,426.61 1728.93,426.61 1745.39,443.07 1745.39,462.98 1746,463.59 1746,514 1751,519 1755.71,519 1759,515.71 1759,492 1763,488 1767.65,488 1771.35,491.7 1771.35,508.34 1777,514 v1(1810,514)
  Bottom Layer w5.61: v1(1810,514) 1810.51,513.49 1854.96,513.49 U2.12@1855.47,512.98
B34_P_L8: U1.AB3 U2.20 | length 980.8
  Top Layer w5.61: U1.AB3@1294.96,699.93 1297.62,699.93 1338.55,659 1380,659 1433,606 1433,494 1458,469 1516,469 1531.42,469 cw(c1531.42,462.7) 1537.72,462.7 1537.72,455.3 ccw(c1544.03,455.3) 1550.33,455.3 1550.33,465.09 cw(c1556.64,465.09) 1562.94,465.09 1562.94,455.3 ccw(c1569.25,455.3) 1575.55,455.3 1575.55,465.09 cw(c1581.86,465.09) 1588.16,465.09 1588.16,455.3 ccw(c1594.47,455.3) 1600.77,455.3 1600.77,465.09 cw(c1607.08,465.09) 1613.38,465.09 1613.38,455.3 ccw(c1619.69,455.3) 1625.99,455.3 1625.99,465.09 cw(c1632.3,465.09) 1638.6,465.09 1638.6,455.3 ccw(c1644.91,455.3) 1651.21,455.3 1651.21,462.7 cw(c1657.52,462.7) 1657.52,469 1672,469 1692,489 1692,558 1725,591 v1@1813,591
  Bottom Layer w5.61: v1(1810,592) 1810.14,591.86 1855.33,591.86 U2.20@1855.47,591.72
B34_P_L9: U1.Y3 U2.13 | length 1003.7
  Top Layer w5.61: U1.Y3@1216.22,699.93 1218.42,699.93 1235.2,683.16 v1(1237.4,683.16)
  Bottom Layer w5.61: v1(1237.4,683.16) 1237.02,682.78 1237.02,662.75 1253.33,646.44 1253.33,644.89 1279.23,619 1392,619 1433.5,577.5 1433.5,383.5 1433.91,383.09 1447,370 1457.25,370 ccw(c1457.25,376.3) 1463.56,376.3 1463.56,389.27 cw(c1469.86,389.27) 1476.17,389.27 1476.17,368.92 ccw(c1482.47,368.92) 1488.78,368.92 1488.78,389.27 cw(c1495.08,389.27) 1501.39,389.27 1501.39,368.92 ccw(c1507.69,368.92) 1514,368.92 1514,389.27 cw(c1520.3,389.27) 1526.61,389.27 1526.61,361.69 ccw(c1532.91,361.69) 1539.22,361.69 1539.22,372.76 cw(c1549.98,372.76) 1542.37,380.37 1545.17,383.17 1547,385 1547,459.34 1620.33,532.67 U2.13@1664.53,532.67
B34_P_L10: U1.AA5 U2.24 | length 976.4
  Top Layer w5.61: U1.AA5@1255.59,778.67 1275.28,758.98 1313.39,758.98 1339.88,732.49 1339.88,699.12 1356,683 1407,683 1462,628 1462,532 1470.61,523.39 1551.51,523.39 1566.93,523.39 cw(c1566.93,517.09) 1573.23,517.09 1573.23,503.91 ccw(c1579.54,503.91) 1585.84,503.91 1585.84,517.09 cw(c1592.15,517.09) 1598.45,517.09 1598.45,503.91 ccw(c1604.76,503.91) 1611.06,503.91 1611.06,517.09 cw(c1617.37,517.09) 1623.67,517.09 1623.67,503.91 ccw(c1629.98,503.91) 1636.28,503.91 1636.28,517.09 cw(c1642.59,517.09) 1642.59,523.39 1655.71,523.39 1657.36,525.03 1659,526.68 1659,571 1720,632 v1@1811,632
  Bottom Layer w5.61: v1(1810,633) 1810.95,632.05 1854.52,632.05 U2.24@1855.47,631.09
B34_P_L11: U1.Y4 U2.15 | length 973.8
  Top Layer w5.61: U1.Y4@1216.22,739.3 1216.22,738.26 1238.24,716.24 v1(1238.24,715.2)
  Bottom Layer w5.61: v1(1238.24,715.2) 1240.32,715.2 1325.02,630.5 1413.5,630.5 1452.25,591.75 1452.25,416.75 1457.5,411.5 1459,410 1460.3,410 ccw(c1460.3,416.3) 1466.61,416.3 1466.61,455.3 cw(c1472.91,455.3) 1479.22,455.3 1479.22,411.47 ccw(c1485.52,411.47) 1491.83,411.47 1491.83,455.3 cw(c1498.13,455.3) 1504.44,455.3 1504.44,416.3 ccw(c1510.74,416.3) 1510.74,410 1530.71,410 1533.75,413.04 1534,413.29 1534,467 1620,553 1663.89,553 U2.15@1664.53,552.35
B34_P_L12: U1.V4 U2.52 | length 1011.1
  Top Layer w5.61: U1.V4@1137.48,739.3 1137.48,739.13 1157.12,719.49 v1(1157.12,719.32)
  Layer 4 w5.61: v1(1157.12,719.32) 1157.42,719.61 1177.39,719.61 1229,668 1379,668 1444,733 1444,810 1551,917 1551,968 1575.29,992.29 1636.71,992.29 1662,967 1662,933 1688,907 v1@1808,907
  Bottom Layer w5.61: v1(1810,908) 1810.66,907.34 1854.81,907.34 U2.52@1855.47,906.68
B34_P_L14: U1.T5 U2.48 | length 1067.2
  Top Layer w5.61: U1.T5@1058.74,778.67 1061.79,778.67 1061.79,778.15 1074.95,764.98 v1(1077.48,764.98)
  Layer 4 w5.61: v1(1077.48,764.98) 1078.52,764.98 1106.69,736.82 1106.69,711.31 1117,701 1133,701 1140,694 1140,685.11 1151.25,673.85 1161.15,673.85 1184,651 1184,638 1202.53,619.47 1369.47,619.47 1482,732 1482,804 1564.39,886.39 1600.98,886.39 1619.59,905 1631,905 1668,868 v1@1810,868
  Bottom Layer w5.61: v1(1810,869) 1810.84,868.16 1854.63,868.16 U2.48@1855.47,867.31
B34_P_L15: U1.W6 U2.21 | length 987
  Top Layer w5.61: U1.W6@1176.85,818.04 1177.5,818.04 1195.89,799.65 v1(1196.54,799.65)
  Bottom Layer w5.61: v1(1196.54,799.65) 1196.54,798.35 1224.38,770.51 1246.86,770.51 1327.36,690 1369,690 1381.02,690 ccw(c1381.02,696.3) 1387.33,696.3 1387.33,750.19 cw(c1393.63,750.19) 1399.94,750.19 1399.94,687.91 ccw(c1406.24,687.91) 1412.55,687.91 1412.55,750.19 cw(c1418.85,750.19) 1425.16,750.19 1425.16,686.97 ccw(c1431.46,686.97) 1437.77,686.97 1437.77,750.19 cw(c1444.07,750.19) 1450.38,750.19 1450.38,696.3 ccw(c1456.68,696.3) 1456.68,690 1473,690 1478.4,684.6 1479,684 1479,669 1536.6,611.4 U2.21@1664.53,611.4 U2.21@1662.93,613
B34_P_L16: U1.U6 U2.56 | length 1050.8
  Top Layer w5.61: U1.U6@1098.11,818.04 v1(1117.8,798.35)
  Layer 4 w5.61: v1(1117.8,798.35) 1135.15,781 1155.39,781 1172.83,763.57 1172.83,762.51 1190.26,745.07 1210.84,745.07 1213.34,742.58 1224.88,742.58 1230.07,737.39 1241.61,737.39 1271,708 1373,708 1423,758 1423,840 1527,944 1527,990 1551,1014 1676,1014 1701,989 1701,960 1715,946 v1@1810,946
  Bottom Layer w5.61: v1(1810,947) 1810.47,946.53 1855,946.53 U2.56@1855.47,946.05
B34_P_L17: U1.R6 U2.36 | length 985
  Top Layer w5.61: U1.R6@1019.37,818.04 v1(1039.06,798.35)
  Layer 3 w5.61: v1(1039.06,798.35) 1057.27,780.14 1083.76,780.14 1090.32,773.58 1128.77,773.58 1129.58,772.77 1175.58,772.77 1178.2,775.39 1209.11,775.39 1211.73,772.77 1253.23,772.77 1283,743 1329.52,743 1340.76,731.76 1340.76,677.24 1366,652 1668,652 1768,752 v1@1813,752
  Bottom Layer w5.61: v1(1810,753) 1812.12,750.88 1828.31,750.88 1828.61,750.58 1854.09,750.58 U2.36@1855.47,749.2
B34_P_L18: U1.Y6 U2.23 | length 1037.5
  Top Layer w5.61: U1.Y6@1216.22,818.04 1218.88,818.04 1235.76,801.16 v1(1238.41,801.16)
  Bottom Layer w5.61: v1(1238.41,801.16) 1239.51,800.06 1255.68,800.06 1258,797.74 1273.42,797.74 cw(c1273.42,791.43) 1279.72,791.43 1279.72,775.06 ccw(c1286.03,775.06) 1292.33,775.06 1292.33,803.17 cw(c1298.64,803.17) 1304.94,803.17 1304.94,766.2 ccw(c1311.25,766.2) 1317.55,766.2 1317.55,799.59 cw(c1323.86,799.59) 1330.16,799.59 1330.16,740.98 ccw(c1336.47,740.98) 1342.77,740.98 1342.77,791.43 cw(c1349.08,791.43) 1349.08,797.73 1359,797.74 1377,797.74 1392.42,797.74 cw(c1392.42,791.43) 1398.72,791.43 1398.72,771.76 ccw(c1405.03,771.76) 1411.33,771.76 1411.33,799.09 cw(c1417.64,799.09) 1423.94,799.09 1423.94,771.8 ccw(c1430.25,771.8) 1436.55,771.8 1436.55,799.09 cw(c1442.86,799.09) 1449.16,799.09 1449.16,771.84 ccw(c1455.47,771.84) 1461.77,771.84 1461.77,786.8 cw(c1468.08,786.8) 1472.53,791.26 1480,783.8 1489,774.8 1489,672.59 1527.59,634 1616,634 1618.91,631.09 U2.23@1664.54,631.09
B34_P_L19: U1.V7 U2.60 | length 978.6
  Top Layer w5.61: U1.V7@1137.48,857.41 v1(1157.17,837.72)
  Layer 4 w5.61: v1(1157.17,837.72) 1160.14,837.72 1170.86,827 1254.14,827 1320.14,761 1363,761 1388,786 1388,879 1494,985 1494,1005 1534,1045 1714,1045 1739,1020 1739,1000 1751,988 v1@1810,988
  Bottom Layer w5.61: v1(1810,989) 1811.79,987.21 1853.68,987.21 U2.60@1855.47,985.42
B34_P_L20: U1.AB7 U2.32 | length 977.9
  Top Layer w5.61: U1.AB7@1294.96,857.41 1319.59,857.41 1403,774 1403,752.29 1406.29,749 1442,749 1506.5,684.5 1518,684.5 1520.81,684.5 ccw(c1520.81,690.8) 1527.11,690.8 1527.11,706.79 cw(c1533.42,706.79) 1539.72,706.79 1539.72,685.42 ccw(c1546.03,685.42) 1552.33,685.42 1552.33,706.79 cw(c1558.64,706.79) 1564.94,706.79 1564.94,688.73 ccw(c1571.25,688.73) 1577.55,688.73 1577.55,706.79 cw(c1583.86,706.79) 1590.16,706.79 1590.16,688.74 ccw(c1596.47,688.74) 1602.77,688.74 1602.77,706.79 cw(c1609.08,706.79) 1615.38,706.79 1615.38,688.76 ccw(c1621.69,688.76) 1627.99,688.76 1627.99,706.79 cw(c1634.3,706.79) 1640.6,706.79 1640.6,688.78 ccw(c1646.91,688.78) 1653.21,688.78 1653.21,718.2 cw(c1659.52,718.2) 1665.82,718.2 1665.82,697.04 ccw(c1672.13,697.04) 1676.58,692.58 1697,713 1698,714 v1(1810,714)
  Bottom Layer w5.61: v1(1810,714) 1833.59,714 1837.75,709.83 U2.32@1855.47,709.83
B34_P_L21: U1.V9 U2.42 | length 998.9
  Top Layer w5.61: U1.V9@1137.48,936.15 v1(1157.17,916.46)
  Layer 3 w5.61: v1(1157.17,916.46) 1177.63,896 1273.43,896 1360,809.43 1364.43,805 1464.81,805 1467.61,805 ccw(c1467.61,811.3) 1473.92,811.3 1473.92,828.7 cw(c1480.22,828.7) 1486.53,828.7 1486.53,795.91 ccw(c1492.83,795.91) 1499.14,795.91 1499.14,828.7 cw(c1505.44,828.7) 1511.75,828.7 1511.75,795.91 ccw(c1518.05,795.91) 1524.36,795.91 1524.36,828.7 cw(c1530.66,828.7) 1536.97,828.7 1536.97,811.3 ccw(c1543.27,811.3) 1543.27,805 1564,805 1580,805 1584,809 1599.23,809 1608.66,799.57 1608.66,799.03 1617.83,789.86 1734.86,789.86 1753,808 v1@1790,808
  Bottom Layer w5.61: v1@1790,808 1790.13,808.13 1855.34,808.13 U2.42@1855.47,808.26
  other v1: 1787,808
B34_P_L22: U1.AA8 U2.34 | length 995.3
  Top Layer w5.61: U1.AA8@1255.59,896.78 1275.28,877.09 1325.91,877.09 1416,787 1416,772 1421,767 1448.41,767 1492.7,722.7 1636.7,722.7 1646.5,732.5 1646.5,744.71 1649.79,748 1661,748 1663.81,748 ccw(c1663.81,754.3) 1670.11,754.3 1670.11,771.7 cw(c1676.42,771.7) 1682.72,771.7 1682.72,729.54 ccw(c1689.03,729.54) 1695.33,729.54 1695.33,771.7 cw(c1701.64,771.7) 1707.94,771.7 1707.94,729.91 ccw(c1714.25,729.91) 1720.55,729.91 1720.55,771.7 cw(c1726.86,771.7) 1733.16,771.7 1733.16,729.91 ccw(c1739.47,729.91) 1745.77,729.91 1745.77,741.7 cw(c1752.08,741.7) 1752.08,748 1762.75,748 1771,748 v1(1787,732)
  Bottom Layer w5.61: v1(1787,732) 1832.35,732 1832.72,731.63 1853.35,731.63 U2.34@1855.47,729.52
B34_P_L23: U1.Y8 U2.29 | length 996.5
  Top Layer w5.61: U1.Y8@1216.25,896.78 v1(1235.91,877.16)
  Bottom Layer w5.61: v1(1235.91,877.16) 1250.15,877.16 1258,885 1329,885 1365,921 1367.81,921 ccw(c1367.81,927.3) 1374.11,927.3 1374.11,937.1 cw(c1380.42,937.1) 1386.72,937.1 1386.72,918.09 ccw(c1393.03,918.09) 1399.33,918.09 1399.33,937.1 cw(c1405.64,937.1) 1411.94,937.1 1411.94,918.07 ccw(c1418.25,918.07) 1424.55,918.07 1424.55,937.1 cw(c1430.86,937.1) 1437.16,937.1 1437.16,918.07 ccw(c1443.47,918.07) 1449.77,918.07 1449.77,937.1 cw(c1456.08,937.1) 1462.38,937.1 1462.38,918.06 ccw(c1468.69,918.06) 1474.99,918.06 1474.99,937.1 cw(c1481.3,937.1) 1487.6,937.1 1487.6,913.4 ccw(c1493.91,913.4) 1500.21,913.4 1500.21,937.1 cw(c1506.52,937.1) 1512.82,937.1 1512.82,927.3 ccw(c1519.13,927.3) 1519.13,921 1525,921 1537.02,908.98 1539,907 1539,701 1549,691 1663.68,691 U2.29@1664.54,690.15
B34_P_L24: U1.W9 U2.31 | length 1054.2
  Top Layer w5.61: U1.W9@1176.85,936.15 1176.85,935.57 1196.54,915.89 v1(1196.54,915.31)
  Bottom Layer w5.61: v1(1196.54,915.31) 1197.69,915.31 1216,897 1242,897 1248,903 1284.88,903 1313.88,932 1345,932 1382,969 1393.19,969 1395.99,969 ccw(c1395.99,975.3) 1402.3,975.3 1402.3,982.7 cw(c1408.6,982.7) 1414.91,982.7 1414.91,959.05 ccw(c1421.21,959.05) 1427.52,959.05 1427.52,982.7 cw(c1433.82,982.7) 1440.13,982.7 1440.13,959.03 ccw(c1446.43,959.03) 1452.74,959.03 1452.74,982.7 cw(c1459.04,982.7) 1465.35,982.7 1465.35,959.01 ccw(c1471.65,959.01) 1477.96,959.01 1477.96,982.7 cw(c1484.26,982.7) 1490.57,982.7 1490.57,958.99 ccw(c1496.87,958.99) 1503.18,958.99 1503.18,982.7 cw(c1509.48,982.7) 1515.79,982.7 1515.79,975.3 ccw(c1522.09,975.3) 1522.09,969 1535,969 1556,948 1556,715.29 1559.29,712 1625,712 1627.17,709.83 U2.31@1664.53,709.83
DDR3_A0: U1.P2 U9.N3 | length 1004.1
  Top Layer w5.61: v1(812.14,112.02) 814.65,112.02 824.66,102.02 U9.N3@826.97,102.02 ; U1.P2@980,660.56 980,656.75 988.36,648.39 988.36,643.3 v1(990.68,640.99)
  Layer 3 w5.61: v1(812.14,112.02) 833.02,112.02 847,126 847,128.81 ccw(c840.69,128.81) 840.69,135.11 810.34,135.11 cw(c810.34,141.42) 810.34,147.72 883.53,147.72 ccw(c883.53,154.03) 883.53,160.33 810.57,160.33 cw(c810.57,166.64) 810.57,172.94 884.94,172.94 ccw(c884.94,179.25) 884.94,185.55 853.31,185.55 cw(c853.31,191.86) 847,191.86 847,212 847,261.76 847.43,262.19 847.43,317.43 865,335 912,335 952,375 952,558 952,593.19 981.05,622.24 981.05,628.09 990.68,637.72 v1(990.68,640.99)
DDR3_A1: U1.K3 U9.P7 | length 1004.4
  Top Layer w5.61: v1(810.28,681.15) 810.28,684.42 822.52,696.66 U1.K3@822.52,699.93 ; U9.P7@858.47,227.99 858.47,230.31 861.31,233.15 861.31,239.31 v1(862.15,240.15)
  Layer 4 w5.61: v1(810.28,681.15) 810.28,677.88 827,661.16 827,615.18 827.31,614.87 827.31,589.05 841.36,575 853,575 861,567 861,524 865.82,519.18 877.11,507.89 cw(c872.65,503.43) 872.65,497.13 862.59,497.13 ccw(c862.59,490.82) 862.59,484.52 883.88,484.52 cw(c883.88,478.21) 883.88,471.91 853.31,471.91 ccw(c853.31,465.6) 853.31,459.3 883.88,459.3 cw(c883.88,452.99) 883.88,446.69 853.31,446.69 ccw(c853.31,440.38) 853.31,434.08 883.88,434.08 cw(c883.88,427.77) 883.88,421.47 853.31,421.47 ccw(c853.31,415.16) 853.31,408.86 891.3,408.86 cw(c891.3,402.55) 891.3,396.25 853.31,396.25 ccw(c853.31,389.94) 853.31,383.64 903.13,383.64 cw(c903.13,377.33) 903.13,371.03 853.31,371.03 ccw(c853.31,364.72) 853.31,358.42 877.19,358.42 cw(c877.19,352.11) 881.65,347.65 877,343 847.43,313.43 847.43,265.19 859.84,252.78 859.84,242.47 v1(862.15,240.15)
DDR3_A2: U1.N5 U9.P3 | length 985.4
  Top Layer w5.61: U9.P3@858.47,102.01 858.47,100.6 872.15,86.92 v1(872.15,85.5) ; U1.N5@940.63,778.67 940.63,774.86 948.84,766.65 948.84,761.3 v1(951.15,758.98)
  Layer 4 w5.61: v1(872.15,85.5) 871.31,86.35 871.31,103.31 912,144 973,144 984,155 984,191.71 980.71,195 914.78,195 907.78,202 907.78,283 ; 908,283 908,290 938,320 969,320 985,336 985,508.18 907.54,585.64 907.54,727.64 917.9,738 939.33,738 943.3,741.97 943.3,747.86 951.15,755.71 v1(951.15,758.98)
DDR3_A3: U1.M6 U9.N2 | length 990
  Top Layer w5.61: U9.N2@826.97,70.52 826.97,72.32 840.85,86.2 v1(840.85,88) ; U1.M6@901.26,818.04 901.26,817.73 920.95,798.04 v1(920.95,797.74)
  Layer 4 w5.61: v1(840.85,88) 841,88.16 841,112 883,154 885,156 886.42,157.42 886.42,158.81 ccw(c880.11,158.81) 880.11,165.11 852.73,165.11 cw(c852.73,171.42) 852.73,177.72 883.36,177.72 ccw(c883.36,184.03) 883.36,190.33 852.73,190.33 cw(c852.73,196.64) 852.73,202.94 880.11,202.94 ccw(c880.11,209.25) 886.42,209.25 886.42,222 888.89,224.47 888.89,320.89 901,333 947,379 947,493.42 886.42,554 886.42,763.83 920.33,797.74 v1(920.95,797.74)
DDR3_A4: U1.M2 U9.P8 | length 1032.7
  Top Layer w5.61: U9.P8@858.47,259.49 860.11,261.13 860.11,266.16 862.59,268.63 v1(862.59,271.9) ; U1.M2@901.26,660.56 902.46,660.56 922.14,640.87 v1(923.34,640.87)
  Layer 3 w5.61: v1(862.59,271.9) 862.59,272.33 907.25,317 950,317 978,317 985,324 985,334.82 ccw(c978.69,334.82) 978.69,341.13 cw(c978.69,347.43) 978.69,353.74 981.08,353.74 ccw(c981.08,360.04) 981.08,366.35 975.02,366.35 cw(c975.02,372.65) 975.02,378.96 981.08,378.96 ccw(c981.08,385.26) 981.08,391.57 971.31,391.57 cw(c971.31,397.87) 971.31,404.18 982.11,404.18 ccw(c982.11,410.48) 982.11,416.79 971.31,416.79 cw(c971.31,423.09) 971.31,429.4 990.92,429.4 ccw(c990.92,435.7) 990.92,442.01 971.31,442.01 cw(c971.31,448.31) 971.31,454.62 998.69,454.62 ccw(c998.69,460.92) 998.69,467.23 971.31,467.23 cw(c971.31,473.53) 971.31,479.84 998.69,479.84 ccw(c998.69,486.14) 998.69,492.45 971.31,492.45 cw(c971.31,498.75) 971.31,505.06 998.69,505.06 ccw(c998.69,511.36) 998.69,517.67 971.31,517.67 cw(c971.31,523.97) 971.31,530.28 998.69,530.28 ccw(c998.69,536.58) 998.69,542.89 991.31,542.89 cw(c991.31,549.19) 985,549.19 985,552 985,558 985,603 1013.96,631.96 1013.96,643.27 1001.09,656.15 967.22,656.15 964.21,659.16 939.23,659.16 923.34,643.26 v1(923.34,640.87)
DDR3_A5: U1.N3 U9.P2 | length 1033.9
  Top Layer w5.61: U9.P2@858.47,70.51 858.47,68.94 869.53,57.89 v1(869.53,56.31) ; U1.N3@940.63,699.93 940.63,696.12 946.42,690.33 946.42,683.53 v1(948.73,681.22)
  Layer 3 w5.61: v1(869.53,56.31) 869.53,59.46 856.15,72.83 856.15,102.16 885,131 ; 886,131 912,157 912,273 926.03,287.03 941.46,287.03 942.9,285.59 950,285.59 1004.59,285.59 1011,292 1017,298 1017,301.11 ccw(c1010.69,301.11) 1010.69,307.42 1003.31,307.42 cw(c1003.31,313.72) 1003.31,320.03 1014.09,320.03 ccw(c1014.09,326.33) 1014.09,332.64 1003.31,332.64 cw(c1003.31,338.94) 1003.31,345.25 1014.09,345.25 ccw(c1014.09,351.55) 1014.09,357.86 1003.31,357.86 cw(c1003.31,364.16) 1003.31,370.47 1014.09,370.47 ccw(c1014.09,376.77) 1014.09,383.08 1003.31,383.08 cw(c1003.31,389.38) 1003.31,395.69 1014.09,395.69 ccw(c1014.09,401.99) 1014.09,408.3 1004.33,408.3 cw(c1004.33,414.6) 1004.33,420.91 1010.69,420.91 ccw(c1010.69,427.21) 1017,427.21 1017,551 1017,558 1017,569 1028.45,580.45 1034.06,580.45 1043.88,590.26 1043.88,603.15 1023.31,623.71 1023.31,646.81 1004.87,665.26 970.99,665.26 956.01,680.24 949.71,680.24 v1(948.73,681.22)
DDR3_A6: U1.M3 U9.R8 | length 1054.7
  Top Layer w5.61: U9.R8@889.96,259.5 889.96,260.95 904.21,275.2 915.97,275.2 918.28,272.89 935.2,272.89 v1(937.24,270.84) ; U1.M3@901.26,699.93 902.46,699.93 922.14,680.24 v1(923.34,680.24)
  Layer 3 w5.61: v1(923.34,680.24) 923.34,682.17 937.54,696.37 963.09,696.37 963.69,695.77 1027.91,695.77 1028.95,694.74 1047.12,694.74 1054.96,686.89 1054.96,650.35 1053.62,649.01 1053.62,634.66 1053.15,634.19 1053.15,586.16 1030,563 1030,558 1030,120.29 1026.71,117 994.29,117 991,120.29 991,267.49 983.24,275.24 956.52,275.24 953.72,272.44 938.84,272.44 v1(937.24,270.84)
DDR3_A7: U1.N4 U9.R2 | length 1032.1
  Top Layer w5.61: U9.R2@889.96,70.52 892.13,70.52 907.88,54.77 v1(932.86,54.77) ; U1.N4@940.63,739.3 940.63,735.49 950.42,725.7 950.42,721.93 v1(952.73,719.61)
  Layer 3 w5.61: v1(932.86,54.77) 951.09,73 1021,73 1041.61,93.61 1041.61,401 1041.61,416.42 cw(c1047.91,416.42) 1047.91,422.72 1055.31,422.72 ccw(c1055.31,429.03) 1055.31,435.33 1047.91,435.33 cw(c1047.91,441.64) 1047.91,447.94 1055.31,447.94 ccw(c1055.31,454.25) 1055.31,460.55 1047.91,460.55 cw(c1047.91,466.86) 1047.91,473.16 1055.31,473.16 ccw(c1055.31,479.47) 1055.31,485.77 1047.91,485.77 cw(c1047.91,492.08) 1047.91,498.38 1048.67,498.38 ccw(c1048.67,504.69) 1048.67,510.99 1047.91,510.99 cw(c1047.91,517.3) 1041.61,517.3 1041.61,527 1041.61,544.61 1062.73,565.74 1062.73,645.23 1064.07,646.57 1064.07,690.66 1050.89,703.84 1032.72,703.84 1031.68,704.88 967.47,704.88 v1(952.73,719.61)